# EAGLE board breakout7 (EAGLE 7.5.0)
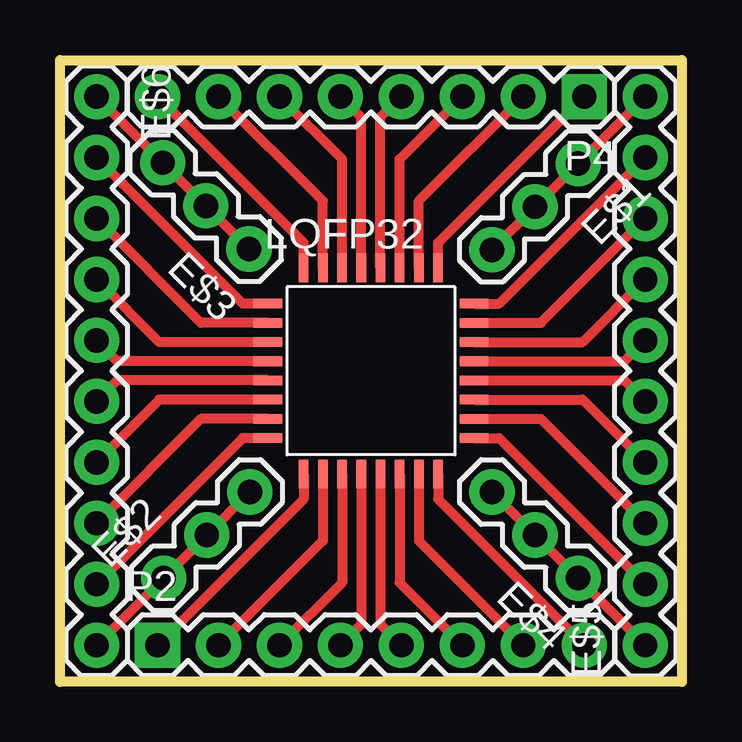
[diagram p0: board, top side]

Size 25.91 x 25.91 mm. Coordinates in mm from the lower left corner, seen from the top.
Outline: 0,25.91 25.91,25.91 25.91,0 0,0 0,25.91
Copper layers (1*16): Top 0.035mm / dielectric 1.5mm / Bottom 0.035mm
Design rules "default": minimum track width 10mil, minimum drill 24mil, track to track 8mil, track to pad 8mil, pad to pad 8mil, via to via 8mil, smd to smd 8mil, copper to edge 40mil, drill to drill 8mil, minimum pad ring 10mil, minimum via ring 8mil, stop-mask expansion 4mil, vias tented up to drill 0mil, thermal gap 10mil

## Footprints (pad centres in the part's own frame; a part is rotated, then mirrored left to right if it is on the bottom)
1X03 = drill 1.016 pad 1.88: 1 0,0; 2 2.54,0; 3 5.08,0
1X10 = drill 1.016 pad 1.88: 1 0,0; 2 2.54,0; 3 5.08,0; 4 7.62,0; 5 10.16,0; 6 12.7,0; 7 15.24,0; 8 17.78,0; 9 20.32,0; 10 22.86,0
LQFP32-7X7 = smd 1.2 x 0.4: 1 -4.3,2.8; 2 -4.3,2; 3 -4.3,1.2; 4 -4.3,0.4; 5 -4.3,-0.4; 6 -4.3,-1.2; 7 -4.3,-2; 8 -4.3,-2.8; 17 4.3,-2.8; 18 4.3,-2; 19 4.3,-1.2; 20 4.3,-0.4; 21 4.3,0.4; 22 4.3,1.2; 23 4.3,2; 24 4.3,2.8 | smd 0.4 x 1.2: 9 -2.8,-4.3; 10 -2,-4.3; 11 -1.2,-4.3; 12 -0.4,-4.3; 13 0.4,-4.3; 14 1.2,-4.3; 15 2,-4.3; 16 2.8,-4.3; 25 2.8,4.3; 26 2,4.3; 27 1.2,4.3; 28 0.4,4.3; 29 -0.4,4.3; 30 -1.2,4.3; 31 -2,4.3; 32 -2.8,4.3
1X08 = drill 1.016 pad 1.88 square: 1 0,0 | drill 1.016 pad 1.88: 2 2.54,0; 3 5.08,0; 4 7.62,0; 5 10.16,0; 6 12.7,0; 7 15.24,0; 8 17.78,0

## Placement (x,y rotation side)
E$1  [1X03]  21.59,21.59 225 top
E$2  [1X03]  4.32,4.32 45 top
E$3  [1X03]  7.87,18.03 135 top
E$4  [1X03]  21.59,4.32 135 top
E$5  [1X10]  24.38,1.52 90 top
E$6  [1X10]  1.52,24.38 270 top
LQFP32  [LQFP32-7X7]  12.95,12.95 0 top
P2  [1X08]  4.06,1.52 0 top
P4  [1X08]  21.84,24.38 180 top

## Library data of the parts
E$1-E$6 P2 P4 = SparkFun-Connectors
LQFP32 = st-microelectronics

## Nets
BOOT0: LQFP32.31 P4.7
PA4: LQFP32.10 P2.2
PA5: LQFP32.11 P2.3
PA6: LQFP32.12 P2.4
PA7: LQFP32.13 P2.5
PB0: LQFP32.14 P2.6
PB1: LQFP32.15 P2.7
PB3: LQFP32.26 P4.2
PB4: LQFP32.27 P4.3
PB5: LQFP32.28 P4.4
PB6: LQFP32.29 P4.5
PB7: LQFP32.30 P4.6
S$2: LQFP32.9 P2.1
S$3: E$2.1 E$2.2 E$2.3 E$6.10
S$4: E$4.1 E$4.2 E$4.3 E$5.1
S$5: E$6.9 LQFP32.8
S$6: E$1.1 E$1.2 E$1.3 E$5.10
S$7: E$3.1 E$3.2 E$3.3 E$6.1
S$8: E$6.8 LQFP32.7
S$9: E$6.7 LQFP32.6
S$10: E$6.6 LQFP32.5
S$11: LQFP32.16 P2.8
S$12: E$6.5 LQFP32.4
S$13: LQFP32.25 P4.1
S$14: LQFP32.32 P4.8
S$15: E$6.4 LQFP32.3
S$16: E$6.3 LQFP32.2
S$17: E$6.2 LQFP32.1
S$18: E$5.2 LQFP32.17
S$19: E$5.3 LQFP32.18
S$20: E$5.4 LQFP32.19
S$21: E$5.5 LQFP32.20
S$22: E$5.6 LQFP32.21
S$23: E$5.7 LQFP32.22
S$24: E$5.8 LQFP32.23
S$25: E$5.9 LQFP32.24

## Tracks (layer width: path | path; a pad name or v marks a point on that pad's centre or on a via)
BOOT0
  Top 0.406: LQFP32.31 10.95,20.03 P4.7
PA4
  Top 0.406: LQFP32.10 10.95,5.87 P2.2
PA5
  Top 0.406: LQFP32.11 11.75,4.13 P2.3
PA6
  Top 0.406: LQFP32.12 12.55,2.39 P2.4
PA7
  Top 0.406: LQFP32.13 13.35,2.39 P2.5
PB0
  Top 0.406: LQFP32.14 14.15,4.13 P2.6
PB1
  Top 0.406: LQFP32.15 14.95,5.87 P2.7
PB3
  Top 0.406: LQFP32.26 14.95,20.03 P4.2
PB4
  Top 0.406: LQFP32.27 14.15,21.77 P4.3
PB5
  Top 0.406: LQFP32.28 13.35,23.51 P4.4
PB6
  Top 0.406: LQFP32.29 12.55,23.51 P4.5
PB7
  Top 0.406: LQFP32.30 11.75,21.77 P4.6
S$2
  Top 0.406: LQFP32.9 10.15,7.61 P2.1
S$3
  Top 0.406: E$2.3 E$2.2 E$2.1 E$6.10
S$4
  Top 0.406: E$4.3 E$4.2 E$4.1 E$5.1
S$5
  Top 0.406: LQFP32.8 7.61,10.15 E$6.9
S$6
  Top 0.406: E$1.3 E$1.2 E$1.1 E$5.10
S$7
  Top 0.406: E$3.1 E$3.2 E$3.3 E$6.1
S$8
  Top 0.406: LQFP32.7 5.87,10.95 E$6.8
S$9
  Top 0.406: LQFP32.6 4.13,11.75 E$6.7
S$10
  Top 0.406: LQFP32.5 2.39,12.55 E$6.6
S$11
  Top 0.406: LQFP32.16 15.75,7.61 P2.8
S$12
  Top 0.406: LQFP32.4 2.39,13.35 E$6.5
S$13
  Top 0.406: LQFP32.25 15.75,18.29 P4.1
S$14
  Top 0.406: LQFP32.32 10.15,18.29 P4.8
S$15
  Top 0.406: LQFP32.3 4.13,14.15 E$6.4
S$16
  Top 0.406: LQFP32.2 5.87,14.95 E$6.3
S$17
  Top 0.406: LQFP32.1 7.61,15.75 E$6.2
S$18
  Top 0.406: LQFP32.17 18.29,10.15 E$5.2
S$19
  Top 0.406: LQFP32.18 20.03,10.95 E$5.3
S$20
  Top 0.406: LQFP32.19 21.77,11.75 E$5.4
S$21
  Top 0.406: LQFP32.20 23.51,12.55 E$5.5
S$22
  Top 0.406: LQFP32.21 23.51,13.35 E$5.6
S$23
  Top 0.406: LQFP32.22 21.77,14.15 E$5.7
S$24
  Top 0.406: LQFP32.23 20.03,14.95 E$5.8
S$25
  Top 0.406: LQFP32.24 18.29,15.75 E$5.9